# Altium PCB wifi_car.PcbDoc (part 3 of 5)
Units mm, origin at the board's own origin, x right, y up, seen from the top; angles counter-clockwise.
Board outline 68.55 x 80.89 mm, 2 copper layers (Top Layer, Bottom Layer); 133 components, 98 nets, 473 pads, 106 vias.
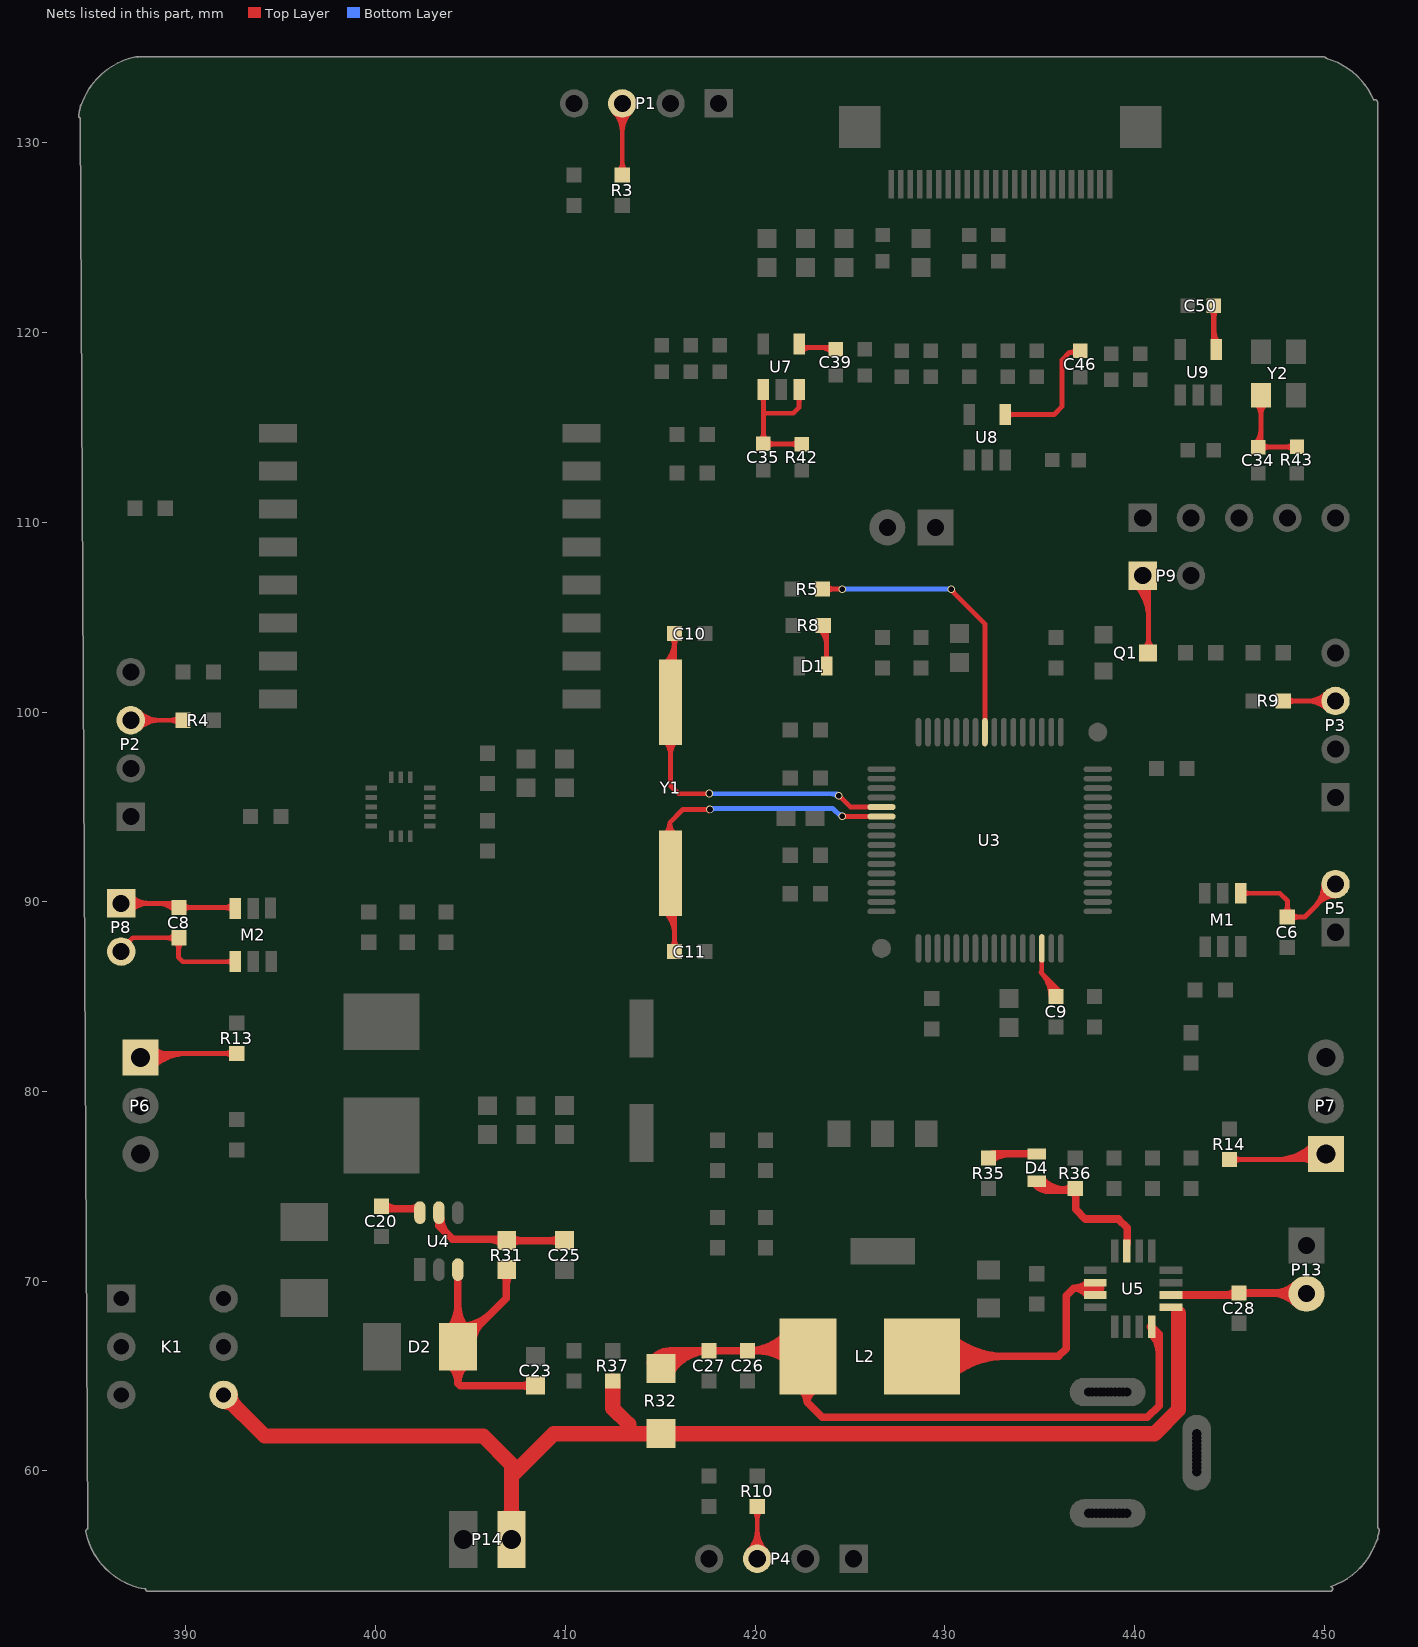
[diagram p3: the nets of this part, all layers, seen from the top]

## Via types
v1: diameter 0.4, hole 0.3, Top Layer to Bottom Layer, 101 vias
v2: diameter 5, hole 4.8, Top Layer to Bottom Layer, 4 vias
v3: diameter 0.6, hole 0.5, Top Layer to Bottom Layer, 1 vias

## Nets (pads, with @x,y where several pads share a name; then routed paths per layer and width w, separated by ;. In a path a pad name is that pad's centre, name@x,y a point inside that pad or via, vN(x,y) a via of type N, cw(c..) or ccw(c..) an arc to the next point about the centre after c; other vN are vias at no path point) (continued)
NetC6_2: C6.2 M1.1 P5.2 | length 24.6
  Top Layer w0.254: M1.1@445.606,90.449 447.668,90.449 448.067,90.05 C6.2@448.067,89.474 ; C6.2@448.056,89.192 448.963,89.192 450.381,90.61 P5.2@450.847,90.61 ; M1.1@445.728,90.327 cw(c446.024,90.031) 446.024,90.449 ; M1.1@445.728,90.327 cw(c446.024,90.031) 446.024,90.449 ; M1.1@445.728,90.327 cw(c446.024,90.031) 446.024,90.449 ; M1.1@445.728,90.571 ccw(c446.024,90.867) 446.024,90.449 ; M1.1@445.728,90.571 ccw(c446.024,90.867) 446.024,90.449 ; M1.1@445.728,90.571 ccw(c446.024,90.867) 446.024,90.449 ; C6.2@447.863,89.385 ccw(c447.37,89.878) 448.067,89.878 ; C6.2@447.863,89.385 ccw(c447.37,89.878) 448.067,89.878 ; C6.2@447.863,89.385 ccw(c447.37,89.878) 448.067,89.878 ; 448.067,89.825 ccw(c448.689,89.825) C6.2@448.249,89.385 ; 448.067,89.825 ccw(c448.689,89.825) C6.2@448.249,89.385 ; 448.067,89.825 ccw(c448.689,89.825) C6.2@448.249,89.385 ; C6.2@448.249,88.999 cw(c448.715,88.533) 448.715,89.192 ; C6.2@448.249,88.999 cw(c448.715,88.533) 448.715,89.192 ; C6.2@448.249,88.999 cw(c448.715,88.533) 448.715,89.192 ; C6.2@448.249,89.385 ccw(c448.715,89.851) 448.715,89.192 ; C6.2@448.249,89.385 ccw(c448.715,89.851) 448.715,89.192 ; C6.2@448.249,89.385 ccw(c448.715,89.851) 448.715,89.192 ; 449.457,89.686 ccw(c448.211,90.932) P5.2@449.973,90.932 ; 449.457,89.686 ccw(c448.211,90.932) P5.2@449.973,90.932 ; 449.457,89.686 ccw(c448.211,90.932) P5.2@449.973,90.932 ; 449.715,89.944 cw(c450.596,89.063) P5.2@450.596,90.309 ; 449.715,89.944 cw(c450.596,89.063) P5.2@450.596,90.309 ; 449.715,89.944 cw(c450.596,89.063) P5.2@450.596,90.309 ; 449.89,90.12 ccw(c449.078,90.932) P5.2@450.227,90.932 ; 449.89,90.12 ccw(c449.078,90.932) P5.2@450.227,90.932 ; 449.89,90.12 ccw(c449.078,90.932) P5.2@450.227,90.932
NetC8_1: C8.1 M2.6 P8.1 | length 31.8
  Top Layer w0.254: P8.1@386.588,89.916 C8.1@389.605,89.916 ; C8.1@389.636,89.7 392.187,89.7 ; M2.6@392.449,89.711 392.197,89.711 ; P8.1@386.849,89.655 cw(c387.479,89.025) 387.479,89.916 ; P8.1@386.849,89.655 cw(c387.479,89.025) 387.479,89.916 ; P8.1@386.849,89.655 cw(c387.479,89.025) 387.479,89.916 ; P8.1@386.849,90.177 ccw(c387.479,90.807) 387.479,89.916 ; P8.1@386.849,90.177 ccw(c387.479,90.807) 387.479,89.916 ; P8.1@386.849,90.177 ccw(c387.479,90.807) 387.479,89.916 ; P8.1@387.029,89.476 cw(c388.092,88.412) 388.092,89.916 ; P8.1@387.029,89.476 cw(c388.092,88.412) 388.092,89.916 ; P8.1@387.029,89.476 cw(c388.092,88.412) 388.092,89.916 ; P8.1@387.029,90.357 ccw(c388.092,91.42) 388.092,89.916 ; P8.1@387.029,90.357 ccw(c388.092,91.42) 388.092,89.916 ; P8.1@387.029,90.357 ccw(c388.092,91.42) 388.092,89.916 ; 388.455,89.916 cw(c388.455,88.519) C8.1@389.443,89.507 ; 388.455,89.916 cw(c388.455,88.519) C8.1@389.443,89.507 ; 388.455,89.916 cw(c388.455,88.519) C8.1@389.443,89.507 ; 389.069,89.916 cw(c389.069,89.133) C8.1@389.623,89.687 ; 389.069,89.916 cw(c389.069,89.133) C8.1@389.623,89.687 ; 389.069,89.916 cw(c389.069,89.133) C8.1@389.623,89.687 ; C8.1@389.829,89.507 cw(c390.295,89.041) 390.295,89.7 ; C8.1@389.829,89.507 cw(c390.295,89.041) 390.295,89.7 ; C8.1@389.829,89.507 cw(c390.295,89.041) 390.295,89.7 ; C8.1@389.829,89.893 ccw(c390.295,90.359) 390.295,89.7 ; C8.1@389.829,89.893 ccw(c390.295,90.359) 390.295,89.7 ; C8.1@389.829,89.893 ccw(c390.295,90.359) 390.295,89.7 ; 392.039,89.7 cw(c392.039,89.088) M2.6@392.472,89.521 ; 392.039,89.7 cw(c392.039,89.088) M2.6@392.472,89.521 ; 392.039,89.7 cw(c392.039,89.088) M2.6@392.472,89.521 ; 392.161,89.674 cw(c392.421,89.414) M2.6@392.643,89.708 ; 392.161,89.674 cw(c392.421,89.414) M2.6@392.643,89.708 ; 392.161,89.674 cw(c392.421,89.414) M2.6@392.643,89.708 ; 392.166,89.68 cw(c392.42,89.425) M2.6@392.645,89.706 ; 392.166,89.68 cw(c392.42,89.425) M2.6@392.645,89.706 ; 392.166,89.68 cw(c392.42,89.425) M2.6@392.645,89.706 ; 392.187,89.7 cw(c392.187,89.398) M2.6@392.446,89.554 ; 392.187,89.7 cw(c392.187,89.398) M2.6@392.446,89.554 ; 392.187,89.7 cw(c392.187,89.398) M2.6@392.446,89.554 ; 392.187,89.7 392.197,89.711 ; 392.198,89.711 cw(c392.198,89.437) M2.6@392.441,89.563 ; 392.198,89.711 cw(c392.198,89.437) M2.6@392.441,89.563 ; 392.198,89.711 cw(c392.198,89.437) M2.6@392.441,89.563
NetC8_2: C8.2 M2.1 P8.2 | length 15.2
  Top Layer w0.254: P8.2@386.771,87.671 387.2,88.1 C8.2@389.636,88.1 ; C8.2@389.604,87.985 389.604,87.083 389.843,86.843 M2.1@392.594,86.843 ; 388.977,88.1 ccw(c388.977,88.759) C8.2@389.443,88.293 ; 388.977,88.1 cw(c388.977,87.441) C8.2@389.443,87.907 ; 388.977,88.1 ccw(c388.977,88.759) C8.2@389.443,88.293 ; 388.977,88.1 cw(c388.977,87.441) C8.2@389.443,87.907 ; 388.977,88.1 ccw(c388.977,88.759) C8.2@389.443,88.293 ; 388.977,88.1 cw(c388.977,87.441) C8.2@389.443,87.907 ; C8.2@389.443,87.907 cw(c389.055,87.519) 389.604,87.519 ; C8.2@389.443,87.907 cw(c389.055,87.519) 389.604,87.519 ; C8.2@389.443,87.907 cw(c389.055,87.519) 389.604,87.519 ; 389.604,87.363 cw(c390.373,87.363) C8.2@389.829,87.907 ; 389.604,87.363 cw(c390.373,87.363) C8.2@389.829,87.907 ; 389.604,87.363 cw(c390.373,87.363) C8.2@389.829,87.907 ; 392.176,86.843 ccw(c392.176,87.261) M2.1@392.472,86.965 ; 392.176,86.843 cw(c392.176,86.425) M2.1@392.472,86.721 ; 392.176,86.843 ccw(c392.176,87.261) M2.1@392.472,86.965 ; 392.176,86.843 cw(c392.176,86.425) M2.1@392.472,86.721 ; 392.176,86.843 ccw(c392.176,87.261) M2.1@392.472,86.965 ; 392.176,86.843 cw(c392.176,86.425) M2.1@392.472,86.721
NetC9_2: C9.2 U3.30 | length 16.6
  Top Layer w0.254: U3.30@435.116,87.543 435.116,86.226 435.858,85.484 ; C9.2@435.858,85.086 435.858,85.484 ; 435.059,86.282 cw(c433.776,84.999) C9.2@435.591,84.999 ; 435.059,86.282 cw(c433.776,84.999) C9.2@435.591,84.999 ; 435.059,86.282 cw(c433.776,84.999) C9.2@435.591,84.999 ; 435.493,85.848 cw(c434.643,84.999) C9.2@435.845,84.999 ; 435.493,85.848 cw(c434.643,84.999) C9.2@435.845,84.999 ; 435.493,85.848 cw(c434.643,84.999) C9.2@435.845,84.999 ; 435.618,85.723 cw(c435.323,85.428) C9.2@435.65,85.168 ; 435.618,85.723 cw(c435.323,85.428) C9.2@435.65,85.168 ; 435.618,85.723 cw(c435.323,85.428) C9.2@435.65,85.168 ; C9.2@435.718,85.229 ccw(c435.556,85.484) 435.858,85.484 ; C9.2@435.718,85.229 ccw(c435.556,85.484) 435.858,85.484 ; C9.2@435.718,85.229 ccw(c435.556,85.484) 435.858,85.484 ; 435.82,85.522 cw(c435.548,85.25) C9.2@435.849,85.01 ; 435.82,85.522 cw(c435.548,85.25) C9.2@435.849,85.01 ; 435.82,85.522 cw(c435.548,85.25) C9.2@435.849,85.01 ; 435.858,85.484 ccw(c436.146,85.484) C9.2@436.001,85.235 ; 435.858,85.484 ccw(c436.146,85.484) C9.2@436.001,85.235 ; 435.858,85.484 ccw(c436.146,85.484) C9.2@436.001,85.235 ; 435.927,85.415 cw(c435.51,84.999) C9.2@436.099,84.999 ; 435.927,85.415 cw(c435.51,84.999) C9.2@436.099,84.999 ; 435.927,85.415 cw(c435.51,84.999) C9.2@436.099,84.999
NetC10_2: C10.2 U3.5 Y1.2 | length 37.8
  Top Layer w0.254: Y1.2@415.544,100.512 415.544,96.119 415.967,95.696 v1@417.515,95.696 ; Y1.2@415.762,101.889 C10.2@415.762,104.291 ; v1@424.502,95.53 425.039,94.993 U3.5@426.666,94.993 ; Y1.2@415.21,98.528 cw(c414.402,97.72) 415.544,97.72 ; Y1.2@415.21,98.528 cw(c414.402,97.72) 415.544,97.72 ; Y1.2@415.21,98.528 cw(c414.402,97.72) 415.544,97.72 ; Y1.2@415.21,102.496 ccw(c413.875,103.831) C10.2@415.762,103.831 ; Y1.2@415.21,102.496 ccw(c413.875,103.831) C10.2@415.762,103.831 ; Y1.2@415.21,102.496 ccw(c413.875,103.831) C10.2@415.762,103.831 ; Y1.2@415.389,102.317 ccw(c414.488,103.218) 415.762,103.218 ; Y1.2@415.389,102.317 ccw(c414.488,103.218) 415.762,103.218 ; Y1.2@415.389,102.317 ccw(c414.488,103.218) 415.762,103.218 ; 415.544,97.72 cw(c416.686,97.72) Y1.2@415.878,98.528 ; 415.544,97.72 cw(c416.686,97.72) Y1.2@415.878,98.528 ; 415.544,97.72 cw(c416.686,97.72) Y1.2@415.878,98.528 ; C10.2@415.567,103.947 cw(c415.095,103.475) 415.762,103.475 ; C10.2@415.567,103.947 cw(c415.095,103.475) 415.762,103.475 ; C10.2@415.567,103.947 cw(c415.095,103.475) 415.762,103.475 ; 415.762,102.777 ccw(c416.159,102.777) Y1.2@415.878,102.496 ; 415.762,102.777 ccw(c416.159,102.777) Y1.2@415.878,102.496 ; 415.762,102.777 ccw(c416.159,102.777) Y1.2@415.878,102.496 ; 415.762,103.487 cw(c416.413,103.487) C10.2@415.953,103.947 ; 415.762,103.487 cw(c416.413,103.487) C10.2@415.953,103.947 ; 415.762,103.487 cw(c416.413,103.487) C10.2@415.953,103.947 ; 417.388,95.696 ccw(c417.388,95.909) v1@417.538,95.758 ; 417.388,95.696 ccw(c417.388,95.909) v1@417.538,95.758 ; 417.388,95.696 ccw(c417.388,95.909) v1@417.538,95.758 ; v1@424.41,95.518 cw(c424.41,95.268) 424.587,95.445 ; v1@424.41,95.518 cw(c424.41,95.268) 424.587,95.445 ; v1@424.41,95.518 cw(c424.41,95.268) 424.587,95.445
  Bottom Layer w0.254: v1(417.59,95.706) 417.607,95.689 v1@424.319,95.689 ; v1@417.642,95.758 ccw(c417.808,95.924) 417.808,95.689 ; v1@417.642,95.758 ccw(c417.808,95.924) 417.808,95.689 ; v1@417.642,95.758 ccw(c417.808,95.924) 417.808,95.689 ; 423.997,95.689 cw(c423.997,95.179) v1@424.358,95.54 ; 423.997,95.689 cw(c423.997,95.179) v1@424.358,95.54 ; 423.997,95.689 cw(c423.997,95.179) v1@424.358,95.54
  other v1: 424.41,95.591
NetC11_2: C11.2 U3.6 Y1.1 | length 36.3
  Top Layer w0.254: Y1.1@415.544,91.512 415.502,91.554 415.502,94.167 416.202,94.867 417.504,94.867 v1@417.579,94.792 ; C11.2@415.762,87.606 Y1.1@415.762,91.512 ; v1@424.614,94.493 U3.6@426.666,94.493 ; Y1.1@415.21,89.528 cw(c413.876,88.194) 415.762,88.194 ; Y1.1@415.21,89.528 cw(c413.876,88.194) 415.762,88.194 ; Y1.1@415.21,89.528 cw(c413.876,88.194) 415.762,88.194 ; Y1.1@415.218,93.505 ccw(c414.588,94.167) 415.502,94.167 ; Y1.1@415.218,93.505 ccw(c414.588,94.167) 415.502,94.167 ; Y1.1@415.218,93.505 ccw(c414.588,94.167) 415.502,94.167 ; Y1.1@415.389,89.707 cw(c414.489,88.807) 415.762,88.807 ; Y1.1@415.389,89.707 cw(c414.489,88.807) 415.762,88.807 ; Y1.1@415.389,89.707 cw(c414.489,88.807) 415.762,88.807 ; 415.502,94.167 ccw(c416.268,94.167) Y1.1@415.82,93.546 ; 415.502,94.167 ccw(c416.268,94.167) Y1.1@415.82,93.546 ; 415.502,94.167 ccw(c416.268,94.167) Y1.1@415.82,93.546 ; C11.2@415.567,87.569 ccw(c415.096,88.04) 415.762,88.04 ; C11.2@415.567,87.569 ccw(c415.096,88.04) 415.762,88.04 ; C11.2@415.567,87.569 ccw(c415.096,88.04) 415.762,88.04 ; 415.762,88.031 ccw(c416.415,88.031) C11.2@415.953,87.569 ; 415.762,88.031 ccw(c416.415,88.031) C11.2@415.953,87.569 ; 415.762,88.031 ccw(c416.415,88.031) C11.2@415.953,87.569 ; 415.762,89.246 cw(c416.16,89.246) Y1.1@415.878,89.528 ; 415.762,89.246 cw(c416.16,89.246) Y1.1@415.878,89.528 ; 415.762,89.246 cw(c416.16,89.246) Y1.1@415.878,89.528 ; v1@424.653,94.558 ccw(c424.811,94.715) 424.811,94.493 ; v1@424.653,94.558 ccw(c424.811,94.715) 424.811,94.493 ; v1@424.653,94.558 ccw(c424.811,94.715) 424.811,94.493
  Bottom Layer w0.254: v1(417.622,94.867) 417.672,94.917 424.099,94.917 v1@424.535,94.481 ; v1@417.674,94.816 cw(c417.918,94.572) 417.918,94.917 ; v1@417.674,94.816 cw(c417.918,94.572) 417.918,94.917 ; v1@417.674,94.816 cw(c417.918,94.572) 417.918,94.917 ; 424.32,94.696 ccw(c424.602,94.977) v1@424.602,94.579 ; 424.32,94.696 ccw(c424.602,94.977) v1@424.602,94.579 ; 424.32,94.696 ccw(c424.602,94.977) v1@424.602,94.579
  other v1: 424.602,94.506
NetC20_1: C20.1 U4.6 | length 5.6
  Top Layer w0.4: C20.1@400.346,73.817 402.131,73.817 U4.6@402.336,73.612 ; C20.1@400.445,74.093 ccw(c401.114,74.762) 401.114,73.817 ; C20.1@400.445,74.093 ccw(c401.114,74.762) 401.114,73.817 ; C20.1@400.445,74.093 ccw(c401.114,74.762) 401.114,73.817 ; 401.864,73.817 ccw(c401.864,74.384) U4.6@402.265,73.983 ; 401.864,73.817 ccw(c401.864,74.384) U4.6@402.265,73.983 ; 401.864,73.817 ccw(c401.864,74.384) U4.6@402.265,73.983
NetC23_1: C23.1 D2.2 R31.2 U4.3 | length 50.4
  Top Layer w0.4: D2.2@404.336,67.237 U4.3@404.336,70.612 U4.3@404.336,70.705 ; R31.2@406.892,70.553 406.892,69.104 D2.2@404.336,66.548 404.336,64.622 ; C23.1@408.259,64.484 404.474,64.484 404.336,64.622 ; D2.2@403.77,67.364 ccw(c402.405,68.729) 404.336,68.729 ; D2.2@403.77,67.364 ccw(c402.405,68.729) 404.336,68.729 ; D2.2@403.77,67.364 ccw(c402.405,68.729) 404.336,68.729 ; D2.2@403.833,65.676 cw(c402.981,64.622) 404.336,64.622 ; D2.2@403.833,65.676 cw(c402.981,64.622) 404.336,64.622 ; D2.2@403.833,65.676 cw(c402.981,64.622) 404.336,64.622 ; 404.336,64.622 cw(c405.691,64.622) D2.2@404.839,65.676 ; 404.336,64.622 cw(c405.691,64.622) D2.2@404.839,65.676 ; 404.336,64.622 cw(c405.691,64.622) D2.2@404.839,65.676 ; D2.2@404.336,67.198 ccw(c404.336,68.767) 405.446,67.658 ; D2.2@404.336,67.198 ccw(c404.336,68.767) 405.446,67.658 ; D2.2@404.336,67.198 ccw(c404.336,68.767) 405.446,67.658 ; D2.2@404.336,67.598 ccw(c404.336,70.133) 406.129,68.34 ; D2.2@404.336,67.598 ccw(c404.336,70.133) 406.129,68.34 ; D2.2@404.336,67.598 ccw(c404.336,70.133) 406.129,68.34 ; 404.336,68.729 ccw(c406.267,68.729) D2.2@404.902,67.364 ; 404.336,68.729 ccw(c406.267,68.729) D2.2@404.902,67.364 ; 404.336,68.729 ccw(c406.267,68.729) D2.2@404.902,67.364 ; D2.2@405.136,66.798 cw(c406.464,66.798) 405.525,67.737 ; D2.2@405.136,66.798 cw(c406.464,66.798) 405.525,67.737 ; D2.2@405.136,66.798 cw(c406.464,66.798) 405.525,67.737 ; R31.2@406.699,70.398 cw(c406.233,69.933) 406.892,69.933 ; R31.2@406.699,70.398 cw(c406.233,69.933) 406.892,69.933 ; R31.2@406.699,70.398 cw(c406.233,69.933) 406.892,69.933 ; 406.892,69.84 cw(c407.682,69.84) R31.2@407.124,70.398 ; 406.892,69.84 cw(c407.682,69.84) R31.2@407.124,70.398 ; 406.892,69.84 cw(c407.682,69.84) R31.2@407.124,70.398 ; 407.627,64.484 ccw(c407.627,65.318) C23.1@408.217,64.728 ; 407.627,64.484 ccw(c407.627,65.318) C23.1@408.217,64.728 ; 407.627,64.484 ccw(c407.627,65.318) C23.1@408.217,64.728 ; 407.782,64.484 cw(c407.782,63.869) C23.1@408.217,64.304 ; 407.782,64.484 cw(c407.782,63.869) C23.1@408.217,64.304 ; 407.782,64.484 cw(c407.782,63.869) C23.1@408.217,64.304
NetC25_1: C25.1 R31.1 U4.5 | length 20.8
  Top Layer w0.4: U4.5@403.336,73.612 403.336,72.921 404.054,72.203 406.773,72.203 R31.1@406.985,72.414 ; R31.1@406.911,72.136 C25.1@409.994,72.136 ; U4.5@403.436,73.312 ccw(c404.622,73.312) 403.783,72.473 ; U4.5@403.436,73.312 ccw(c404.622,73.312) 403.783,72.473 ; U4.5@403.436,73.312 ccw(c404.622,73.312) 403.783,72.473 ; 406.025,72.203 cw(c406.025,71.249) R31.1@406.699,71.924 ; 406.025,72.203 cw(c406.025,71.249) R31.1@406.699,71.924 ; 406.025,72.203 cw(c406.025,71.249) R31.1@406.699,71.924 ; 406.35,72.203 ccw(c406.35,72.698) R31.1@406.699,72.348 ; 406.35,72.203 ccw(c406.35,72.698) R31.1@406.699,72.348 ; 406.35,72.203 ccw(c406.35,72.698) R31.1@406.699,72.348 ; R31.1@407.124,71.924 cw(c407.636,71.411) 407.636,72.136 ; R31.1@407.124,71.924 cw(c407.636,71.411) 407.636,72.136 ; R31.1@407.124,71.924 cw(c407.636,71.411) 407.636,72.136 ; R31.1@407.124,72.348 ccw(c407.636,72.86) 407.636,72.136 ; R31.1@407.124,72.348 ccw(c407.636,72.86) 407.636,72.136 ; R31.1@407.124,72.348 ccw(c407.636,72.86) 407.636,72.136 ; 409.235,72.136 ccw(c409.235,72.86) C25.1@409.747,72.348 ; 409.235,72.136 cw(c409.235,71.411) C25.1@409.747,71.923 ; 409.235,72.136 ccw(c409.235,72.86) C25.1@409.747,72.348 ; 409.235,72.136 cw(c409.235,71.411) C25.1@409.747,71.923 ; 409.235,72.136 ccw(c409.235,72.86) C25.1@409.747,72.348 ; 409.235,72.136 cw(c409.235,71.411) C25.1@409.747,71.923
NetC26_2: C26.2 C27.2 L2.2 R32.2 U5.8 | length 99.8
  Top Layer w0.4: R32.2@415.165,65.935 415.562,66.332 ; C26.2@419.456,66.344 419.444,66.332 C27.2@417.576,66.332 ; L2.2@421.639,66.441 421.53,66.332 C26.2@419.608,66.332 ; L2.2@422.75,64.563 422.75,63.622 423.553,62.819 440.675,62.819 441.302,63.446 441.302,67.197 U5.8@440.903,67.596 ; R32.2@414.479,65.717 cw(c415.529,65.129) 415.529,66.332 ; R32.2@414.479,65.717 cw(c415.529,65.129) 415.529,66.332 ; R32.2@414.479,65.717 cw(c415.529,65.129) 415.529,66.332 ; R32.2@414.828,65.521 cw(c416.211,64.747) 416.211,66.332 ; R32.2@414.828,65.521 cw(c416.211,64.747) 416.211,66.332 ; R32.2@414.828,65.521 cw(c416.211,64.747) 416.211,66.332 ; R32.2@415.177,65.326 cw(c416.894,64.365) 416.894,66.332 ; R32.2@415.177,65.326 cw(c416.894,64.365) 416.894,66.332 ; R32.2@415.177,65.326 cw(c416.894,64.365) 416.894,66.332 ; R32.2@415.502,65.719 cw(c415.905,65.989) 415.562,66.332 ; R32.2@415.502,65.719 cw(c415.905,65.989) 415.562,66.332 ; R32.2@415.502,65.719 cw(c415.905,65.989) 415.562,66.332 ; R32.2@415.526,65.131 cw(c417.576,63.983) C27.2@417.576,66.332 ; R32.2@415.526,65.131 cw(c417.576,63.983) C27.2@417.576,66.332 ; R32.2@415.526,65.131 cw(c417.576,63.983) C27.2@417.576,66.332 ; 415.562,66.332 C27.2@417.576,66.332 ; 417.093,66.332 ccw(c417.093,66.815) C27.2@417.435,66.473 ; 417.093,66.332 cw(c417.093,65.849) C27.2@417.435,66.191 ; 417.093,66.332 ccw(c417.093,66.815) C27.2@417.435,66.473 ; 417.093,66.332 cw(c417.093,65.849) C27.2@417.435,66.191 ; 417.093,66.332 ccw(c417.093,66.815) C27.2@417.435,66.473 ; 417.093,66.332 cw(c417.093,65.849) C27.2@417.435,66.191 ; C27.2@417.717,66.191 cw(c418.059,65.849) 418.059,66.332 ; C27.2@417.717,66.191 cw(c418.059,65.849) 418.059,66.332 ; C27.2@417.717,66.191 cw(c418.059,65.849) 418.059,66.332 ; C27.2@417.717,66.473 ccw(c418.059,66.815) 418.059,66.332 ; C27.2@417.717,66.473 ccw(c418.059,66.815) 418.059,66.332 ; C27.2@417.717,66.473 ccw(c418.059,66.815) 418.059,66.332 ; 419.125,66.332 ccw(c419.125,66.815) C26.2@419.467,66.473 ; 419.125,66.332 cw(c419.125,65.849) C26.2@419.467,66.191 ; 419.125,66.332 ccw(c419.125,66.815) C26.2@419.467,66.473 ; 419.125,66.332 cw(c419.125,65.849) C26.2@419.467,66.191 ; 419.125,66.332 ccw(c419.125,66.815) C26.2@419.467,66.473 ; 419.125,66.332 cw(c419.125,65.849) C26.2@419.467,66.191 ; C26.2@419.608,66.332 ccw(c419.608,69.166) L2.2@421.797,67.366 ; C26.2@419.608,66.332 ccw(c419.608,69.166) L2.2@421.797,67.366 ; C26.2@419.608,66.332 ccw(c419.608,69.166) L2.2@421.797,67.366 ; C26.2@419.749,66.191 cw(c420.091,65.849) 420.091,66.332 ; C26.2@419.749,66.191 cw(c420.091,65.849) 420.091,66.332 ; C26.2@419.749,66.191 cw(c420.091,65.849) 420.091,66.332 ; C26.2@419.749,66.473 ccw(c420.091,66.815) 420.091,66.332 ; C26.2@419.749,66.473 ccw(c420.091,66.815) 420.091,66.332 ; C26.2@419.749,66.473 ccw(c420.091,66.815) 420.091,66.332 ; 420.165,66.332 cw(c420.165,63.904) L2.2@421.882,65.621 ; 420.165,66.332 cw(c420.165,63.904) L2.2@421.882,65.621 ; 420.165,66.332 cw(c420.165,63.904) L2.2@421.882,65.621 ; 420.455,66.332 ccw(c420.455,68.47) L2.2@422.106,67.112 ; 420.455,66.332 ccw(c420.455,68.47) L2.2@422.106,67.112 ; 420.455,66.332 ccw(c420.455,68.47) L2.2@422.106,67.112 ; 421.13,66.332 cw(c421.13,64.869) L2.2@422.165,65.904 ; 421.13,66.332 cw(c421.13,64.869) L2.2@422.165,65.904 ; 421.13,66.332 cw(c421.13,64.869) L2.2@422.165,65.904 ; L2.2@421.302,66.332 ccw(c421.302,67.773) L2.2@422.415,66.858 ; L2.2@421.302,66.332 ccw(c421.302,67.773) L2.2@422.415,66.858 ; L2.2@421.302,66.332 ccw(c421.302,67.773) L2.2@422.415,66.858 ; L2.2@422.275,64.351 cw(c421.952,63.621) 422.75,63.621 ; L2.2@422.275,64.351 cw(c421.952,63.621) 422.75,63.621 ; L2.2@422.275,64.351 cw(c421.952,63.621) 422.75,63.621 ; 422.75,63.621 cw(c423.489,63.621) L2.2@423.24,64.316 ; 422.75,63.621 cw(c423.489,63.621) L2.2@423.24,64.316 ; 422.75,63.621 cw(c423.489,63.621) L2.2@423.24,64.316 ; U5.8@440.845,67.592 cw(c440.861,67.484) U5.8@440.938,67.561 ; U5.8@440.845,67.592 cw(c440.861,67.484) U5.8@440.938,67.561 ; U5.8@440.845,67.592 cw(c440.861,67.484) U5.8@440.938,67.561 ; U5.8@440.903,67.196 cw(c439.941,66.234) 441.302,66.234 ; U5.8@440.903,67.196 cw(c439.941,66.234) 441.302,66.234 ; U5.8@440.903,67.196 cw(c439.941,66.234) 441.302,66.234
NetC28_2: C28.2 P13.2 U5.10 | length 19.6
  Top Layer w0.4: U5.10@441.928,69.271 C28.2@445.556,69.271 ; C28.2@445.516,69.38 P13.2@448.621,69.38 ; 444.77,69.271 ccw(c444.77,70.126) C28.2@445.375,69.521 ; 444.77,69.271 ccw(c444.77,70.126) C28.2@445.375,69.521 ; 444.77,69.271 ccw(c444.77,70.126) C28.2@445.375,69.521 ; C28.2@445.657,69.239 cw(c445.999,68.897) 445.999,69.38 ; C28.2@445.657,69.239 cw(c445.999,68.897) 445.999,69.38 ; C28.2@445.657,69.239 cw(c445.999,68.897) 445.999,69.38 ; C28.2@445.657,69.521 ccw(c445.999,69.863) 445.999,69.38 ; C28.2@445.657,69.521 ccw(c445.999,69.863) 445.999,69.38 ; C28.2@445.657,69.521 ccw(c445.999,69.863) 445.999,69.38 ; 447.17,69.38 cw(c447.17,67.44) P13.2@448.542,68.812 ; 447.17,69.38 cw(c447.17,67.44) P13.2@448.542,68.812 ; 447.17,69.38 cw(c447.17,67.44) P13.2@448.542,68.812 ; 447.353,69.38 ccw(c447.353,71.061) P13.2@448.542,69.872 ; 447.353,69.38 ccw(c447.353,71.061) P13.2@448.542,69.872 ; 447.353,69.38 ccw(c447.353,71.061) P13.2@448.542,69.872
NetC34_1: C34.1 R43.2 Y2.4 | length 17.5
  Top Layer w0.254: C34.1@446.532,113.97 R43.2@448.601,113.97 ; C34.1@446.664,114.123 Y2.4@446.664,116.696 ; C34.1@446.352,114.149 ccw(c445.601,114.901) 446.664,114.901 ; C34.1@446.352,114.149 ccw(c445.601,114.901) 446.664,114.901 ; C34.1@446.352,114.149 ccw(c445.601,114.901) 446.664,114.901 ; Y2.4@446.382,116.29 cw(c445.703,115.61) 446.664,115.61 ; Y2.4@446.382,116.29 cw(c445.703,115.61) 446.664,115.61 ; Y2.4@446.382,116.29 cw(c445.703,115.61) 446.664,115.61 ; 446.664,115.61 cw(c447.625,115.61) Y2.4@446.945,116.29 ; 446.664,115.61 cw(c447.625,115.61) Y2.4@446.945,116.29 ; 446.664,115.61 cw(c447.625,115.61) Y2.4@446.945,116.29 ; C34.1@446.712,113.79 cw(c447.145,113.357) 447.145,113.97 ; C34.1@446.712,113.79 cw(c447.145,113.357) 447.145,113.97 ; C34.1@446.712,113.79 cw(c447.145,113.357) 447.145,113.97 ; C34.1@446.712,114.149 ccw(c447.145,114.583) 447.145,113.97 ; C34.1@446.712,114.149 ccw(c447.145,114.583) 447.145,113.97 ; C34.1@446.712,114.149 ccw(c447.145,114.583) 447.145,113.97 ; 447.922,113.97 ccw(c447.922,114.626) R43.2@448.386,114.162 ; 447.922,113.97 ccw(c447.922,114.626) R43.2@448.386,114.162 ; 447.922,113.97 ccw(c447.922,114.626) R43.2@448.386,114.162 ; 447.983,113.97 cw(c447.983,113.4) R43.2@448.386,113.803 ; 447.983,113.97 cw(c447.983,113.4) R43.2@448.386,113.803 ; 447.983,113.97 cw(c447.983,113.4) R43.2@448.386,113.803
NetC35_2: C35.2 R42.1 U7.1 U7.3 | length 19.7
  Top Layer w0.254: C35.2@420.44,114.344 420.44,115.755 ; U7.1@420.44,116.993 420.44,115.755 ; C35.2@420.441,114.136 R42.1@422.199,114.136 ; U7.3@422.313,116.738 422.313,116.045 422.022,115.755 420.44,115.755 ; C35.2@420.262,114.315 ccw(c419.832,114.745) 420.44,114.745 ; C35.2@420.262,114.315 ccw(c419.832,114.745) 420.44,114.745 ; C35.2@420.262,114.315 ccw(c419.832,114.745) 420.44,114.745 ; U7.1@420.317,116.621 cw(c420.022,116.326) 420.44,116.326 ; U7.1@420.317,116.621 cw(c420.022,116.326) 420.44,116.326 ; U7.1@420.317,116.621 cw(c420.022,116.326) 420.44,116.326 ; 420.44,114.753 ccw(c421.059,114.753) C35.2@420.621,114.315 ; 420.44,114.753 ccw(c421.059,114.753) C35.2@420.621,114.315 ; 420.44,114.753 ccw(c421.059,114.753) C35.2@420.621,114.315 ; 420.44,116.326 cw(c420.857,116.326) U7.1@420.562,116.621 ; 420.44,116.326 cw(c420.857,116.326) U7.1@420.562,116.621 ; 420.44,116.326 cw(c420.857,116.326) U7.1@420.562,116.621 ; C35.2@420.621,113.956 cw(c421.055,113.523) 421.055,114.136 ; C35.2@420.621,113.956 cw(c421.055,113.523) 421.055,114.136 ; C35.2@420.621,113.956 cw(c421.055,113.523) 421.055,114.136 ; C35.2@420.621,114.315 ccw(c421.055,114.749) 421.055,114.136 ; C35.2@420.621,114.315 ccw(c421.055,114.749) 421.055,114.136 ; C35.2@420.621,114.315 ccw(c421.055,114.749) 421.055,114.136 ; 421.828,114.136 cw(c421.828,113.479) R42.1@422.292,113.944 ; 421.828,114.136 cw(c421.828,113.479) R42.1@422.292,113.944 ; 421.828,114.136 cw(c421.828,113.479) R42.1@422.292,113.944 ; 421.889,114.136 ccw(c421.889,114.706) R42.1@422.292,114.303 ; 421.889,114.136 ccw(c421.889,114.706) R42.1@422.292,114.303 ; 421.889,114.136 ccw(c421.889,114.706) R42.1@422.292,114.303 ; U7.3@422.217,116.621 cw(c421.988,116.391) 422.313,116.391 ; U7.3@422.217,116.621 cw(c421.988,116.391) 422.313,116.391 ; U7.3@422.217,116.621 cw(c421.988,116.391) 422.313,116.391 ; 422.313,116.26 cw(c422.823,116.26) U7.3@422.462,116.621 ; 422.313,116.26 cw(c422.823,116.26) U7.3@422.462,116.621 ; 422.313,116.26 cw(c422.823,116.26) U7.3@422.462,116.621
NetC39_2: C39.2 U7.4 | length 6
  Top Layer w0.254: U7.4@422.37,119.215 C39.2@423.919,119.215 ; U7.4@422.462,119.021 cw(c422.929,118.554) 422.929,119.215 ; U7.4@422.462,119.021 cw(c422.929,118.554) 422.929,119.215 ; U7.4@422.462,119.021 cw(c422.929,118.554) 422.929,119.215 ; 423.432,119.215 cw(c423.432,118.29) C39.2@424.086,118.944 ; 423.432,119.215 cw(c423.432,118.29) C39.2@424.086,118.944 ; 423.432,119.215 cw(c423.432,118.29) C39.2@424.086,118.944 ; 423.872,119.215 ccw(c423.872,119.516) C39.2@424.086,119.303 ; 423.872,119.215 ccw(c423.872,119.516) C39.2@424.086,119.303 ; 423.872,119.215 ccw(c423.872,119.516) C39.2@424.086,119.303
NetC46_2: C46.2 U8.4 | length 10.4
  Top Layer w0.254: U8.4@433.192,115.684 435.76,115.684 436.185,116.109 436.185,118.565 436.571,118.951 ; C46.2@436.839,118.951 436.571,118.951 ; U8.4@433.314,115.562 cw(c433.61,115.266) 433.61,115.684 ; U8.4@433.314,115.562 cw(c433.61,115.266) 433.61,115.684 ; U8.4@433.314,115.562 cw(c433.61,115.266) 433.61,115.684 ; U8.4@433.314,115.806 ccw(c433.61,116.102) 433.61,115.684 ; U8.4@433.314,115.806 ccw(c433.61,116.102) 433.61,115.684 ; U8.4@433.314,115.806 ccw(c433.61,116.102) 433.61,115.684 ; 436.571,118.951 ccw(c436.571,119.34) C46.2@436.913,119.156 ; 436.571,118.951 ccw(c436.571,119.34) C46.2@436.913,119.156 ; 436.571,118.951 ccw(c436.571,119.34) C46.2@436.913,119.156 ; 436.727,118.951 cw(c436.727,118.626) C46.2@436.957,118.856 ; 436.727,118.951 cw(c436.727,118.626) C46.2@436.957,118.856 ; 436.727,118.951 cw(c436.727,118.626) C46.2@436.957,118.856
NetC50_2: C50.2 U9.4 | length 6.5
  Top Layer w0.3: U9.4@444.183,119.5 C50.2@444.183,121.41 ; C50.2@444.019,121.247 cw(c443.625,120.853) 444.183,120.853 ; C50.2@444.019,121.247 cw(c443.625,120.853) 444.183,120.853 ; C50.2@444.019,121.247 cw(c443.625,120.853) 444.183,120.853 ; 444.183,120.049 ccw(c445.006,120.049) U9.4@444.424,119.466 ; 444.183,120.049 ccw(c445.006,120.049) U9.4@444.424,119.466 ; 444.183,120.049 ccw(c445.006,120.049) U9.4@444.424,119.466 ; 444.183,120.853 cw(c444.74,120.853) C50.2@444.346,121.247 ; 444.183,120.853 cw(c444.74,120.853) C50.2@444.346,121.247 ; 444.183,120.853 cw(c444.74,120.853) C50.2@444.346,121.247
NetD1_1: D1.1 R8.1 | length 8.7
  Top Layer w0.254: R8.1@423.598,104.567 R8.1@423.697,104.467 ; D1.1@423.772,102.42 R8.1@423.772,104.582 ; R8.1@423.405,104.374 cw(c422.518,103.487) 423.772,103.487 ; R8.1@423.405,104.374 cw(c422.518,103.487) 423.772,103.487 ; R8.1@423.405,104.374 cw(c422.518,103.487) 423.772,103.487 ; R8.1@423.584,104.553 cw(c423.131,104.1) 423.772,104.1 ; R8.1@423.584,104.553 cw(c423.131,104.1) 423.772,104.1 ; R8.1@423.584,104.553 cw(c423.131,104.1) 423.772,104.1 ; D1.1@423.65,102.743 ccw(c423.354,103.038) 423.772,103.038 ; D1.1@423.65,102.743 ccw(c423.354,103.038) 423.772,103.038 ; D1.1@423.65,102.743 ccw(c423.354,103.038) 423.772,103.038 ; 423.772,103.038 ccw(c424.19,103.038) D1.1@423.894,102.743 ; 423.772,103.038 ccw(c424.19,103.038) D1.1@423.894,102.743 ; 423.772,103.038 ccw(c424.19,103.038) D1.1@423.894,102.743
NetD4_1: D4.1 R35.1 | length 5.2
  Top Layer w0.4: R35.1@432.308,76.492 432.525,76.709 D4.1@434.492,76.709 ; R35.1@432.449,76.351 cw(c433.315,75.485) 433.315,76.709 ; R35.1@432.449,76.351 cw(c433.315,75.485) 433.315,76.709 ; R35.1@432.449,76.351 cw(c433.315,75.485) 433.315,76.709
NetD4_2: D4.2 R36.2 U5.15 | length 18.7
  Top Layer w0.4: D4.2@434.848,75.268 435.315,74.801 R36.2@436.674,74.801 ; R36.2@436.88,74.892 436.903,74.869 436.903,73.79 437.416,73.277 439.157,73.277 439.614,72.82 U5.15@439.614,71.978 ; D4.2@434.836,75.056 ccw(c435.45,75.67) 435.45,74.801 ; D4.2@434.836,75.056 ccw(c435.45,75.67) 435.45,74.801 ; D4.2@434.836,75.056 ccw(c435.45,75.67) 435.45,74.801 ; D4.2@435.119,75.339 ccw(c436.416,76.636) 436.416,74.801 ; D4.2@435.119,75.339 ccw(c436.416,76.636) 436.416,74.801 ; D4.2@435.119,75.339 ccw(c436.416,76.636) 436.416,74.801 ; D4.2@435.142,75.233 ccw(c435.437,75.124) 435.215,74.901 ; D4.2@435.142,75.233 ccw(c435.437,75.124) 435.215,74.901 ; D4.2@435.142,75.233 ccw(c435.437,75.124) 435.215,74.901 ; 436.178,74.801 ccw(c436.178,75.594) R36.2@436.739,75.033 ; 436.178,74.801 ccw(c436.178,75.594) R36.2@436.739,75.033 ; 436.178,74.801 ccw(c436.178,75.594) R36.2@436.739,75.033 ; R36.2@436.739,74.751 cw(c436.341,74.353) 436.903,74.353 ; R36.2@436.739,74.751 cw(c436.341,74.353) 436.903,74.353 ; R36.2@436.739,74.751 cw(c436.341,74.353) 436.903,74.353 ; 436.903,74.465 cw(c437.307,74.465) R36.2@437.021,74.751 ; 436.903,74.465 cw(c437.307,74.465) R36.2@437.021,74.751 ; 436.903,74.465 cw(c437.307,74.465) R36.2@437.021,74.751
NetK1_4: K1.4 P14.2 R32.1 R37.1 U5.9 | length 81.2
  Top Layer w0.8: K1.4@391.988,64.008 394.157,61.839 405.671,61.839 407.162,60.347 P14.2@407.162,56.388 ; 407.162,59.732 409.385,61.955 441.052,61.955 442.32,63.223 442.32,68.314 ; R37.1@412.496,64.732 412.496,63.305 413.34,62.461 ; K1.4@391.988,63.658 cw(c391.988,62.813) 392.586,63.411 ; K1.4@391.988,63.658 cw(c391.988,62.813) 392.586,63.411 ; K1.4@391.988,63.658 cw(c391.988,62.813) 392.586,63.411 ; K1.4@392.338,64.008 ccw(c393.183,64.008) 392.586,63.411 ; K1.4@392.338,64.008 ccw(c393.183,64.008) 392.586,63.411 ; K1.4@392.338,64.008 ccw(c393.183,64.008) 392.586,63.411 ; P14.2@406.915,57.386 ccw(c406.317,57.983) 407.162,57.983 ; P14.2@406.915,57.386 ccw(c406.317,57.983) 407.162,57.983 ; P14.2@406.915,57.386 ccw(c406.317,57.983) 407.162,57.983 ; 407.162,57.983 ccw(c408.007,57.983) P14.2@407.41,57.386 ; 407.162,57.983 ccw(c408.007,57.983) P14.2@407.41,57.386 ; 407.162,57.983 ccw(c408.007,57.983) P14.2@407.41,57.386 ; 414.112,61.955 ccw(c414.112,62.901) R32.1@414.78,62.232 ; 414.112,61.955 ccw(c414.112,62.901) R32.1@414.78,62.232 ; 414.112,61.955 ccw(c414.112,62.901) R32.1@414.78,62.232 ; 414.213,61.955 cw(c414.213,61.153) R32.1@414.78,61.72 ; 414.213,61.955 cw(c414.213,61.153) R32.1@414.78,61.72 ; 414.213,61.955 cw(c414.213,61.153) R32.1@414.78,61.72 ; R32.1@415.292,61.72 cw(c415.859,61.153) 415.859,61.955 ; R32.1@415.292,61.72 cw(c415.859,61.153) 415.859,61.955 ; R32.1@415.292,61.72 cw(c415.859,61.153) 415.859,61.955 ; R32.1@415.292,62.232 ccw(c415.961,62.901) 415.961,61.955 ; R32.1@415.292,62.232 ccw(c415.961,62.901) 415.961,61.955 ; R32.1@415.292,62.232 ccw(c415.961,62.901) 415.961,61.955
NetL2_1: L2.1 U5.2 U5.3 | length 66.7
  Top Layer w0.4: L2.1@428.801,66.04 435.993,66.04 436.401,66.448 436.401,69.234 436.802,69.635 ; U5.2@437.911,69.904 U5.2@437.928,69.921 438.215,69.635 436.802,69.635 ; L2.1@429.508,65.333 cw(c431.215,63.626) 431.215,66.04 ; L2.1@429.508,65.333 cw(c431.215,63.626) 431.215,66.04 ; L2.1@429.508,65.333 cw(c431.215,63.626) 431.215,66.04 ; L2.1@429.508,66.747 ccw(c431.215,68.454) 431.215,66.04 ; L2.1@429.508,66.747 ccw(c431.215,68.454) 431.215,66.04 ; L2.1@429.508,66.747 ccw(c431.215,68.454) 431.215,66.04 ; L2.1@429.791,65.05 cw(c432.181,62.66) 432.181,66.04 ; L2.1@429.791,65.05 cw(c432.181,62.66) 432.181,66.04 ; L2.1@429.791,65.05 cw(c432.181,62.66) 432.181,66.04 ; L2.1@429.791,67.03 ccw(c432.181,69.42) 432.181,66.04 ; L2.1@429.791,67.03 ccw(c432.181,69.42) 432.181,66.04 ; L2.1@429.791,67.03 ccw(c432.181,69.42) 432.181,66.04 ; L2.1@430.074,64.767 cw(c433.147,61.694) 433.147,66.04 ; L2.1@430.074,64.767 cw(c433.147,61.694) 433.147,66.04 ; L2.1@430.074,64.767 cw(c433.147,61.694) 433.147,66.04 ; L2.1@430.074,67.313 ccw(c433.147,70.386) 433.147,66.04 ; L2.1@430.074,67.313 ccw(c433.147,70.386) 433.147,66.04 ; L2.1@430.074,67.313 ccw(c433.147,70.386) 433.147,66.04 ; 436.802,69.635 cw(c436.802,68.729) U5.3@437.528,69.271 ; 436.802,69.635 cw(c436.802,68.729) U5.3@437.528,69.271 ; 436.802,69.635 cw(c436.802,68.729) U5.3@437.528,69.271 ; 436.837,69.635 ccw(c436.837,70.613) U5.2@437.528,69.921 ; 436.837,69.635 ccw(c436.837,70.613) U5.2@437.528,69.921 ; 436.837,69.635 ccw(c436.837,70.613) U5.2@437.528,69.921 ; U5.3@437.928,69.271 cw(c438.328,69.271) 438.1,69.6 ; U5.3@437.928,69.271 cw(c438.328,69.271) 438.1,69.6 ; U5.3@437.928,69.271 cw(c438.328,69.271) 438.1,69.6
NETLINK: R5.1 U3.57 | length 18.8
  Top Layer w0.254: R5.1@423.556,106.484 v1@424.485,106.484 ; v1@430.347,106.424 432.116,104.656 U3.57@432.116,98.943 ; R5.1@423.749,106.291 cw(c424.215,105.825) 424.215,106.484 ; R5.1@423.749,106.291 cw(c424.215,105.825) 424.215,106.484 ; R5.1@423.749,106.291 cw(c424.215,105.825) 424.215,106.484 ; R5.1@423.749,106.678 ccw(c424.215,107.144) 424.215,106.484 ; R5.1@423.749,106.678 ccw(c424.215,107.144) 424.215,106.484 ; R5.1@423.749,106.678 ccw(c424.215,107.144) 424.215,106.484 ; v1@430.415,106.476 ccw(c430.703,106.476) 430.5,106.272 ; v1@430.415,106.476 ccw(c430.703,106.476) 430.5,106.272 ; v1@430.415,106.476 ccw(c430.703,106.476) 430.5,106.272
  Bottom Layer w0.254: v1(424.598,106.481) v1@430.422,106.481
  other v1: 430.342,106.476
NetP1_3: P1.3 R3.2 | length 18.1
  Top Layer w0.254: R3.2@413.004,128.409 P1.3@413.004,132.08 ; P1.3@412.563,131.639 cw(c411.5,130.576) 413.004,130.576 ; P1.3@412.563,131.639 cw(c411.5,130.576) 413.004,130.576 ; P1.3@412.563,131.639 cw(c411.5,130.576) 413.004,130.576 ; P1.3@412.743,131.819 cw(c412.113,131.189) 413.004,131.189 ; P1.3@412.743,131.819 cw(c412.113,131.189) 413.004,131.189 ; P1.3@412.743,131.819 cw(c412.113,131.189) 413.004,131.189 ; R3.2@412.811,128.501 ccw(c412.345,128.967) 413.004,128.967 ; R3.2@412.811,128.501 ccw(c412.345,128.967) 413.004,128.967 ; R3.2@412.811,128.501 ccw(c412.345,128.967) 413.004,128.967 ; 413.004,128.967 ccw(c413.663,128.967) R3.2@413.197,128.501 ; 413.004,128.967 ccw(c413.663,128.967) R3.2@413.197,128.501 ; 413.004,128.967 ccw(c413.663,128.967) R3.2@413.197,128.501 ; 413.004,130.576 cw(c414.508,130.576) P1.3@413.445,131.639 ; 413.004,130.576 cw(c414.508,130.576) P1.3@413.445,131.639 ; 413.004,130.576 cw(c414.508,130.576) P1.3@413.445,131.639 ; 413.004,131.189 cw(c413.895,131.189) P1.3@413.265,131.819 ; 413.004,131.189 cw(c413.895,131.189) P1.3@413.265,131.819 ; 413.004,131.189 cw(c413.895,131.189) P1.3@413.265,131.819
NetP2_3: P2.3 R4.2 | length 18
  Top Layer w0.254: P2.3@386.588,99.568 R4.2@390.15,99.568 ; P2.3@387.357,99.307 cw(c387.987,98.677) 387.987,99.568 ; P2.3@387.357,99.307 cw(c387.987,98.677) 387.987,99.568 ; P2.3@387.357,99.307 cw(c387.987,98.677) 387.987,99.568 ; P2.3@387.357,99.829 ccw(c387.987,100.459) 387.987,99.568 ; P2.3@387.357,99.829 ccw(c387.987,100.459) 387.987,99.568 ; P2.3@387.357,99.829 ccw(c387.987,100.459) 387.987,99.568 ; P2.3@387.537,99.128 cw(c388.6,98.064) 388.6,99.568 ; P2.3@387.537,99.128 cw(c388.6,98.064) 388.6,99.568 ; P2.3@387.537,99.128 cw(c388.6,98.064) 388.6,99.568 ; P2.3@387.537,100.009 ccw(c388.6,101.072) 388.6,99.568 ; P2.3@387.537,100.009 ccw(c388.6,101.072) 388.6,99.568 ; P2.3@387.537,100.009 ccw(c388.6,101.072) 388.6,99.568 ; 389.193,99.568 ccw(c389.193,100.227) R4.2@389.659,99.761 ; 389.193,99.568 cw(c389.193,98.909) R4.2@389.659,99.375 ; 389.193,99.568 ccw(c389.193,100.227) R4.2@389.659,99.761 ; 389.193,99.568 cw(c389.193,98.909) R4.2@389.659,99.375 ; 389.193,99.568 ccw(c389.193,100.227) R4.2@389.659,99.761 ; 389.193,99.568 cw(c389.193,98.909) R4.2@389.659,99.375
NetP3_3: P3.3 R9.2 | length 17.1
  Top Layer w0.254: R9.2@447.84,100.584 P3.3@450.598,100.584 ; R9.2@448.033,100.391 cw(c448.499,99.925) 448.499,100.584 ; R9.2@448.033,100.391 cw(c448.499,99.925) 448.499,100.584 ; R9.2@448.033,100.391 cw(c448.499,99.925) 448.499,100.584 ; R9.2@448.033,100.777 ccw(c448.499,101.243) 448.499,100.584 ; R9.2@448.033,100.777 ccw(c448.499,101.243) 448.499,100.584 ; R9.2@448.033,100.777 ccw(c448.499,101.243) 448.499,100.584 ; 449.092,100.584 ccw(c449.092,102.088) P3.3@450.156,101.025 ; 449.092,100.584 cw(c449.092,99.08) P3.3@450.156,100.144 ; 449.092,100.584 ccw(c449.092,102.088) P3.3@450.156,101.025 ; 449.092,100.584 cw(c449.092,99.08) P3.3@450.156,100.144 ; 449.092,100.584 ccw(c449.092,102.088) P3.3@450.156,101.025 ; 449.092,100.584 cw(c449.092,99.08) P3.3@450.156,100.144 ; 449.705,100.584 ccw(c449.705,101.475) P3.3@450.335,100.845 ; 449.705,100.584 ccw(c449.705,101.475) P3.3@450.335,100.845 ; 449.705,100.584 ccw(c449.705,101.475) P3.3@450.335,100.845 ; 449.705,100.584 cw(c449.705,99.693) P3.3@450.335,100.323 ; 449.705,100.584 cw(c449.705,99.693) P3.3@450.335,100.323 ; 449.705,100.584 cw(c449.705,99.693) P3.3@450.335,100.323
NetP4_3: P4.3 R10.2 | length 17.1
  Top Layer w0.254: P4.3@420.116,55.372 R10.2@420.116,58.065 ; P4.3@419.676,55.813 ccw(c418.612,56.876) 420.116,56.876 ; P4.3@419.676,55.813 ccw(c418.612,56.876) 420.116,56.876 ; P4.3@419.676,55.813 ccw(c418.612,56.876) 420.116,56.876 ; P4.3@419.855,55.633 ccw(c419.225,56.263) 420.116,56.263 ; P4.3@419.855,55.633 ccw(c419.225,56.263) 420.116,56.263 ; P4.3@419.855,55.633 ccw(c419.225,56.263) 420.116,56.263 ; R10.2@419.923,57.935 cw(c419.457,57.469) 420.116,57.469 ; R10.2@419.923,57.935 cw(c419.457,57.469) 420.116,57.469 ; R10.2@419.923,57.935 cw(c419.457,57.469) 420.116,57.469 ; 420.116,56.263 ccw(c421.007,56.263) P4.3@420.377,55.633 ; 420.116,56.263 ccw(c421.007,56.263) P4.3@420.377,55.633 ; 420.116,56.263 ccw(c421.007,56.263) P4.3@420.377,55.633 ; 420.116,56.876 ccw(c421.62,56.876) P4.3@420.557,55.813 ; 420.116,56.876 ccw(c421.62,56.876) P4.3@420.557,55.813 ; 420.116,56.876 ccw(c421.62,56.876) P4.3@420.557,55.813 ; 420.116,57.469 cw(c420.775,57.469) R10.2@420.309,57.935 ; 420.116,57.469 cw(c420.775,57.469) R10.2@420.309,57.935 ; 420.116,57.469 cw(c420.775,57.469) R10.2@420.309,57.935
NetP6_1: P6.1 R13.1 | length 25.9
  Top Layer w0.254: P6.1@387.792,82.004 R13.1@392.684,82.004 ; P6.1@387.827,81.565 cw(c388.886,80.506) 388.886,82.004 ; P6.1@387.827,81.565 cw(c388.886,80.506) 388.886,82.004 ; P6.1@387.827,81.565 cw(c388.886,80.506) 388.886,82.004 ; P6.1@388.006,81.386 cw(c389.499,79.893) 389.499,82.004 ; P6.1@388.006,81.386 cw(c389.499,79.893) 389.499,82.004 ; P6.1@388.006,81.386 cw(c389.499,79.893) 389.499,82.004 ; P6.1@388.186,81.206 cw(c390.113,79.28) 390.113,82.004 ; P6.1@388.186,81.206 cw(c390.113,79.28) 390.113,82.004 ; P6.1@388.186,81.206 cw(c390.113,79.28) 390.113,82.004 ; P6.1@388.186,82.37 ccw(c389.069,83.253) 389.069,82.004 ; P6.1@388.186,82.37 ccw(c389.069,83.253) 389.069,82.004 ; P6.1@388.186,82.37 ccw(c389.069,83.253) 389.069,82.004 ; 392.025,82.004 ccw(c392.025,82.663) R13.1@392.491,82.197 ; 392.025,82.004 cw(c392.025,81.345) R13.1@392.491,81.811 ; 392.025,82.004 ccw(c392.025,82.663) R13.1@392.491,82.197 ; 392.025,82.004 cw(c392.025,81.345) R13.1@392.491,81.811 ; 392.025,82.004 ccw(c392.025,82.663) R13.1@392.491,82.197 ; 392.025,82.004 cw(c392.025,81.345) R13.1@392.491,81.811
NetP7_1: P7.1 R14.1 | length 26.6
  Top Layer w0.254: R14.1@445.008,76.416 P7.1@449.403,76.416 ; R14.1@445.201,76.223 cw(c445.667,75.757) 445.667,76.416 ; R14.1@445.201,76.223 cw(c445.667,75.757) 445.667,76.416 ; R14.1@445.201,76.223 cw(c445.667,75.757) 445.667,76.416 ; R14.1@445.201,76.609 ccw(c445.667,77.075) 445.667,76.416 ; R14.1@445.201,76.609 ccw(c445.667,77.075) 445.667,76.416 ; R14.1@445.201,76.609 ccw(c445.667,77.075) 445.667,76.416 ; 447.396,76.416 ccw(c447.396,79.4) P7.1@449.506,77.29 ; 447.396,76.416 ccw(c447.396,79.4) P7.1@449.506,77.29 ; 447.396,76.416 ccw(c447.396,79.4) P7.1@449.506,77.29 ; 448.009,76.416 ccw(c448.009,78.787) P7.1@449.686,77.11 ; 448.009,76.416 ccw(c448.009,78.787) P7.1@449.686,77.11 ; 448.009,76.416 ccw(c448.009,78.787) P7.1@449.686,77.11 ; 448.623,76.416 ccw(c448.623,78.173) P7.1@449.865,76.931 ; 448.623,76.416 ccw(c448.623,78.173) P7.1@449.865,76.931 ; 448.623,76.416 ccw(c448.623,78.173) P7.1@449.865,76.931 ; 448.806,76.416 cw(c448.806,75.426) P7.1@449.506,76.126 ; 448.806,76.416 cw(c448.806,75.426) P7.1@449.506,76.126 ; 448.806,76.416 cw(c448.806,75.426) P7.1@449.506,76.126
NetP9_1: P9.1 Q1.3 | length 22.4
  Top Layer w0.254: P9.1@440.436,107.188 440.741,106.883 Q1.3@440.741,103.301 ; P9.1@439.995,106.747 cw(c438.195,104.947) 440.741,104.947 ; P9.1@439.995,106.747 cw(c438.195,104.947) 440.741,104.947 ; P9.1@439.995,106.747 cw(c438.195,104.947) 440.741,104.947 ; P9.1@440.175,106.927 cw(c438.808,105.56) 440.741,105.56 ; P9.1@440.175,106.927 cw(c438.808,105.56) 440.741,105.56 ; P9.1@440.175,106.927 cw(c438.808,105.56) 440.741,105.56 ; P9.1@440.355,107.107 cw(c439.421,106.173) 440.741,106.173 ; P9.1@440.355,107.107 cw(c439.421,106.173) 440.741,106.173 ; P9.1@440.355,107.107 cw(c439.421,106.173) 440.741,106.173 ; Q1.3@440.519,103.352 ccw(c439.981,103.89) 440.741,103.89 ; Q1.3@440.519,103.352 ccw(c439.981,103.89) 440.741,103.89 ; Q1.3@440.519,103.352 ccw(c439.981,103.89) 440.741,103.89 ; 440.741,103.918 ccw(c441.541,103.918) Q1.3@440.975,103.352 ; 440.741,103.918 ccw(c441.541,103.918) Q1.3@440.975,103.352 ; 440.741,103.918 ccw(c441.541,103.918) Q1.3@440.975,103.352 ; 440.741,106.421 cw(c441.203,106.421) P9.1@440.877,106.747 ; 440.741,106.421 cw(c441.203,106.421) P9.1@440.877,106.747 ; 440.741,106.421 cw(c441.203,106.421) P9.1@440.877,106.747